# Altium PCB V2.6.0_ChipSat.PcbDoc (part 2 of 2)
Units mm, origin at the board's own origin, x right, y up, seen from the top; angles counter-clockwise.
Board outline 50 x 60 mm, 2 copper layers (Top Layer, Bottom Layer), stack 1.57 mm thick; 76 components, 55 nets, 288 pads, 115 vias.
Unrouted connection lines stored in the file: 2.
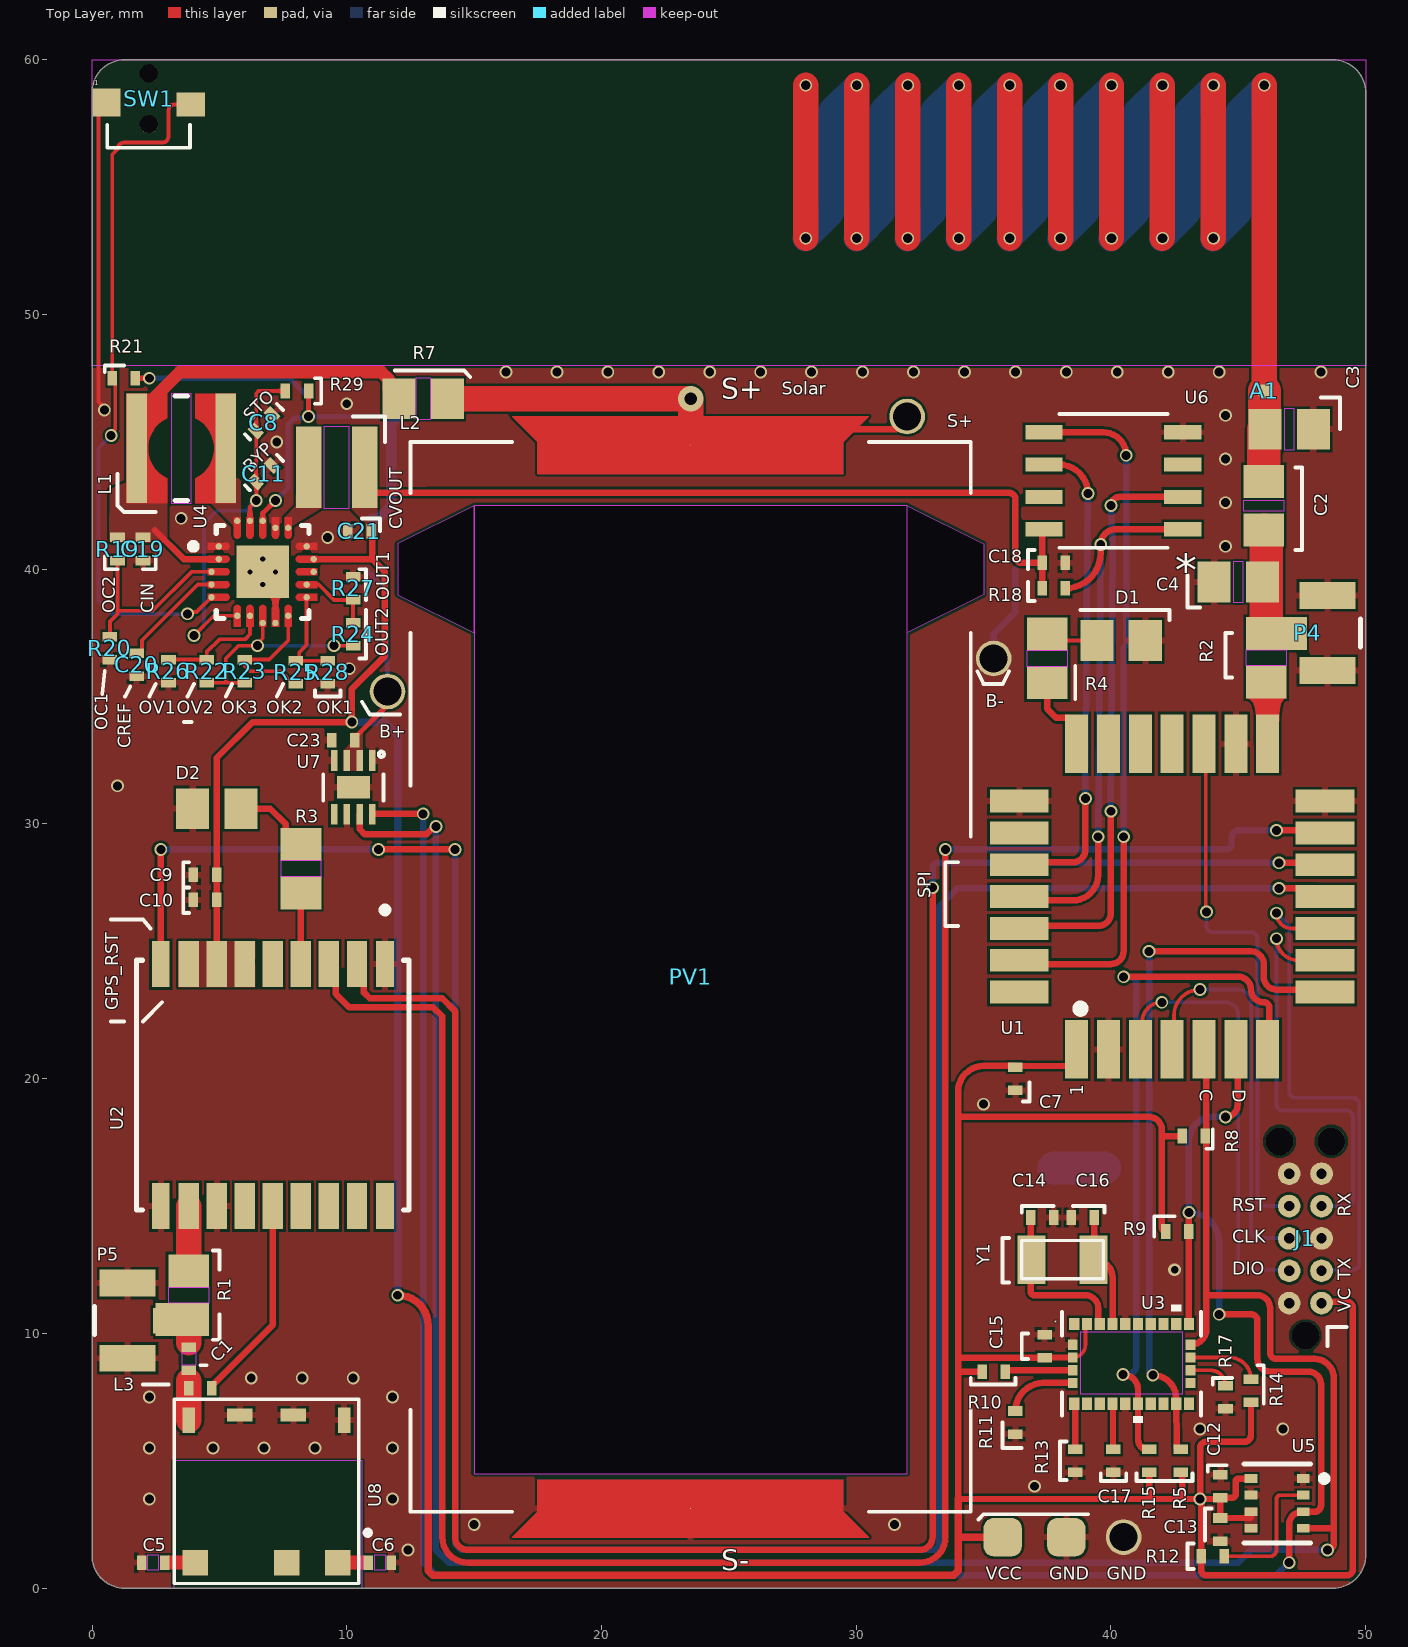
[diagram p0: Top Layer view]

## Silkscreen, mask and mechanical layers (free items; w line width, h text height) (continued)
Top Overlay: (continued)
  text "GND" at 39.834,0.33 h0.5
Bottom Overlay:
  lines w0.15: 9.5,37.5 9.5,39.5 ; 9.5,41 9.5,42.5 ; 11,47 15,47 15,46 15,45.5 ; 37.5,37.5 37.5,39.5 ; 37.5,41 37.5,42.5
  lines w0.152: 43.25,34.25 49.75,34.25 ; 43.25,37.75 49.75,37.75 ; 46.75,32.055 46.75,39.75 ; 7.5,50.75 10.5,50.75 10.5,53.75 ; 7.5,50.75 8,51.25 8,50.25 7.5,50.75 ; 10.5,53.75 10,53.25 11,53.25 10.5,53.75
  lines w0.254: 43.75,30.5 cw(c44.5,30.5) 44.5,31.25 ; 44.5,29.75 ccw(c44.5,30.5) 45.25,30.5
  text "BOARD SIZE: W = 50" at 13.696,58.305 h0.5
  text "DeSCENT CHIPSAT" at 26.576,58.175 h0.8
  text "BOARD SIZE: H = 60" at 13.696,57.305 h0.5
  text "Ver 2.6.0" at 23.8,56.45 h0.8
  text "To user: Put R4 First" at 13.696,56.33 h0.5
  text "R0" at 16.42,56.33 h0.5
  text "LoRa Room Based 0.15mm Clearance Constraint" at 25.67,55.33 h0.5
  text "H" at 11.08,52.17 h0.5 r180
  text "W" at 9.394,49.855 h0.5
  text "CBAT" at 13.72,47.28 h0.5
  text "S+" at 25.8,46.7 h0.8
  text "B+" at 14.42,44.08 h0.5
  text "B-" at 30.67,44.08 h0.5
  text "B+" at 9.42,40.08 h0.5
  text "B-" at 38.42,40.08 h0.5
  text "5.62M" at 45.67,39.33 h0.5
  text "ROV1" at 49.67,39.33 h0.5
  text "7.32M" at 45.67,38.33 h0.5
  text "ROV2" at 49.67,38.33 h0.5
  text "5.11M" at 45.67,36.83 h0.5
  text "ROK1" at 49.67,36.83 h0.5
  text "6.81M" at 45.67,35.83 h0.5
  text "ROK2" at 49.67,35.83 h0.5
  text "1.27M" at 45.67,34.83 h0.5
  text "ROK3" at 49.67,34.83 h0.5
  text "4.87M" at 45.67,33.33 h0.5
  text "ROUT1" at 49.67,33.33 h0.5
  text "8.25M" at 45.67,32.33 h0.5
  text "ROUT2" at 49.67,32.33 h0.5
  text "50" at 38.92,20.42 h0.5 r90
  text "L" at 37.92,14.92 h0.5 r90
  text "O" at 37.92,9.92 h0.5 r90
  text "S" at 37.92,4.92 h0.5 r90
  text "S-" at 25.8,0.7 h0.8

## Text inside footprints (layer, text, board x,y; h text height)
SW1: Top Overlay "1" at 0.08,59.005 h0.2
U3: Top Overlay "*" at 37.764,10.322 h0.2
U6: Top Overlay "*" at 43.396,41.138 h1.27 r180